# Altium PCB 2_Smoke_detector.PcbDoc (part 5 of 5)
Units mil, origin at the board's own origin, x right, y up, seen from the top; angles counter-clockwise.
Board outline 3800 x 3790 mil, 4 copper layers (Top Layer, Layer 1, Layer 2, Bottom Layer), stack 23.756 mil thick; 122 components, 70 nets, 333 pads, 0 vias.
Unrouted connection lines stored in the file: 251.
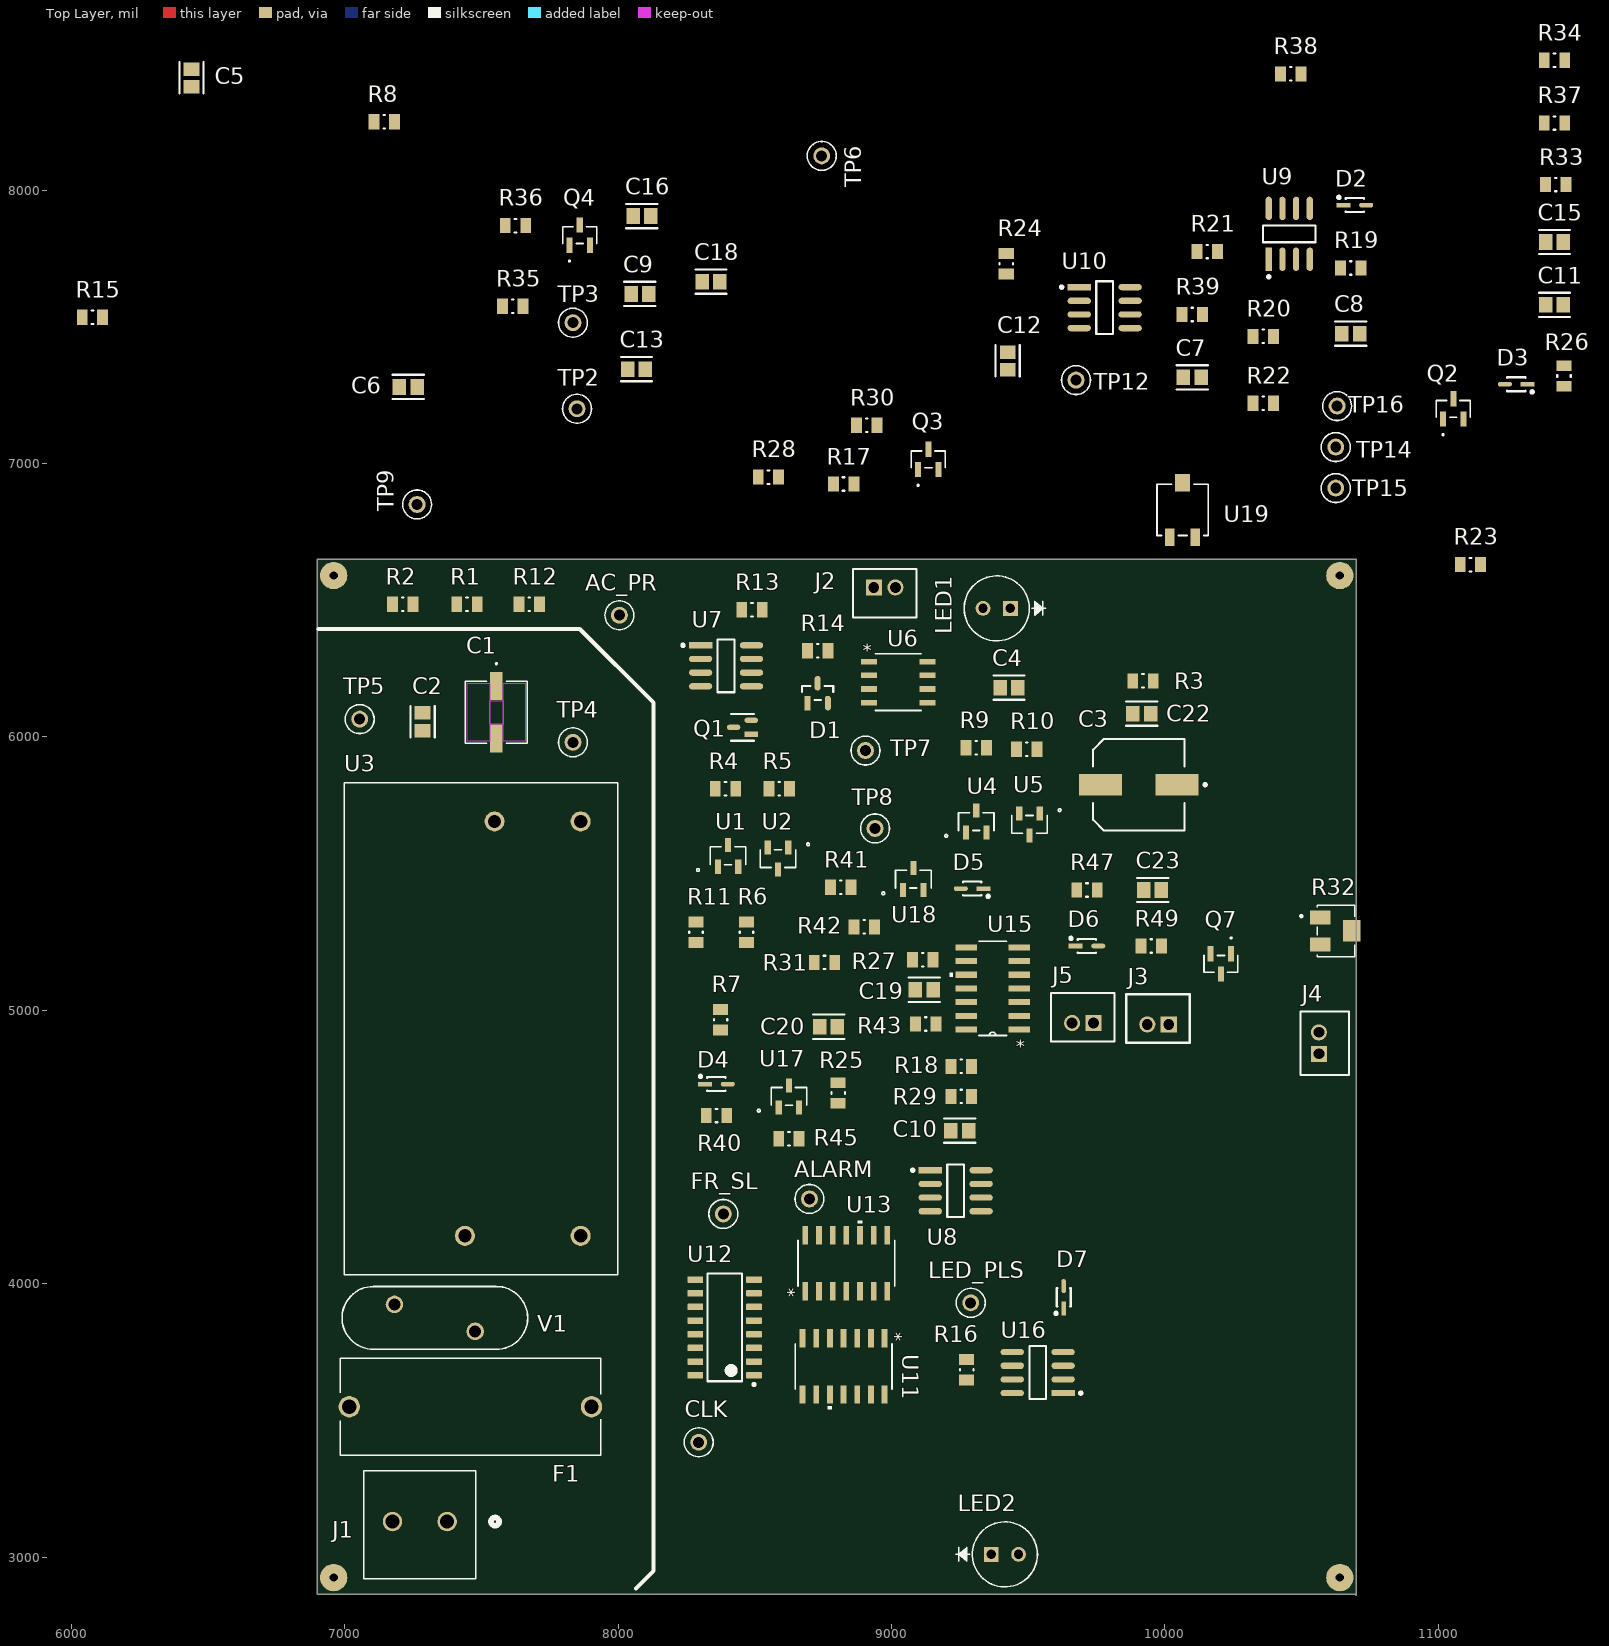
[diagram p0: Top Layer view]

## Part data (continued)
U3: library part IRM-05-5, "AC/DC CONVERTER 5V 5W", Current - Output 1=1A, LCSC Part Number=C48603696, Manufacturer="Mean Well", Max Operating Temperature=70°C, Max Output Power=5W, Max Output Voltage=5.125V, Max Supply Voltage=305V, Min Input Voltage=85V, Min Operating Temperature=-30°C, Min Output Voltage=4.875V, Nominal Output Voltage=5V, Nominal Supply Voltage=115V, Approvals="CB, CE, IEC, TUV, UL", Category="Power Supply Modules", ComponentLink1Description=https://datasheet.octopart.com:443/IRM-05-5-Mean-Well-datasheet-180626755.pdf?src-supplier=IHS, ComponentLink1URL=https://datasheet.octopart.com:443/IRM-05-5-Mean-Well-datasheet-180626755.pdf?src-supplier=IHS, ComponentLink2Description=https://datasheet.octopart.com:443/IRM-05-5-Mean-Well-datasheet-101610177.pdf?src-supplier=Farnell, ComponentLink2URL=https://datasheet.octopart.com:443/IRM-05-5-Mean-Well-datasheet-101610177.pdf?src-supplier=Farnell, ComponentLink3Description=https://datasheet.octopart.com:443/IRM-05-5-Mean-Well-datasheet-67333141.pdf?src-supplier=Sager+Power+Systems, ComponentLink3URL=https://datasheet.octopart.com:443/IRM-05-5-Mean-Well-datasheet-67333141.pdf?src-supplier=Sager+Power+Systems, ComponentLink4Description=https://datasheet.octopart.com:443/IRM-05-5-Mean-Well-datasheet-154740696.pdf?src-supplier=Master+Electronics, ComponentLink4URL=https://datasheet.octopart.com:443/IRM-05-5-Mean-Well-datasheet-154740696.pdf?src-supplier=Master+Electronics, ComponentLink5Description=https://datasheet.octopart.com:443/IRM-05-5-Mean-Well-datasheet-34148673.pdf?src-supplier=Future+Electronics, ComponentLink5URL=https://datasheet.octopart.com:443/IRM-05-5-Mean-Well-datasheet-34148673.pdf?src-supplier=Future+Electronics, ComponentLink6Description=https://datasheet.octopart.com:443/IRM-05-5-Mean-Well-datasheet-27625340.pdf?src-supplier=Jameco+(USA), ComponentLink6URL=https://datasheet.octopart.com:443/IRM-05-5-Mean-Well-datasheet-27625340.pdf?src-supplier=Jameco+(USA), ComponentLink7Description=https://datasheet.octopart.com:443/IRM-05-5-Mean-Well-datasheet-19208722.pdf?src-supplier=Telerex+Europe, ComponentLink7URL=https://datasheet.octopart.com:443/IRM-05-5-Mean-Well-datasheet-19208722.pdf?src-supplier=Telerex+Europe, ComponentLink8Description=https://datasheet.octopart.com:443/IRM-05-5-Mean-Well-datasheet-194193599.pdf?src-supplier=LCSC, ComponentLink8URL=https://datasheet.octopart.com:443/IRM-05-5-Mean-Well-datasheet-194193599.pdf?src-supplier=LCSC, ComponentLink9Description=https://datasheet.octopart.com:443/IRM-05-5-Mean-Well-datasheet-158921293.pdf?src-supplier=Component+Distributors+Inc., ComponentLink9URL=https://datasheet.octopart.com:443/IRM-05-5-Mean-Well-datasheet-158921293.pdf?src-supplier=Component+Distributors+Inc., ComponentLink10Description=https://datasheet.octopart.com:443/IRM-05-5-Mean-Well-datasheet-137204475.pdf?src-supplier=Component+Distributors+Inc., ComponentLink10URL=https://datasheet.octopart.com:443/IRM-05-5-Mean-Well-datasheet-137204475.pdf?src-supplier=Component+Distributors+Inc., ComponentLink11Description=https://datasheet.octopart.com:443/IRM-05-5-Mean-Well-datasheet-151511263.pdf?src-supplier=TME, ComponentLink11URL=https://datasheet.octopart.com:443/IRM-05-5-Mean-Well-datasheet-151511263.pdf?src-supplier=TME, ComponentLink12Description=https://datasheet.octopart.com:443/IRM-05-5-Mean-Well-datasheet-151511270.pdf?src-supplier=TME, ComponentLink12URL=https://datasheet.octopart.com:443/IRM-05-5-Mean-Well-datasheet-151511270.pdf?src-supplier=TME, ComponentLink13Description=https://datasheet.octopart.com:443/IRM-05-5-Mean-Well-datasheet-83579035.pdf?src-supplier=TME, ComponentLink13URL=https://datasheet.octopart.com:443/IRM-05-5-Mean-Well-datasheet-83579035.pdf?src-supplier=TME, ComponentLink14Description=https://datasheet.octopart.com:443/IRM-05-5-Mean-Well-datasheet-24998212.pdf?src-supplier=TME, ComponentLink14URL=https://datasheet.octopart.com:443/IRM-05-5-Mean-Well-datasheet-24998212.pdf?src-supplier=TME, ComponentLink15Description=https://datasheet.octopart.com:443/IRM-05-5-Mean-Well-datasheet-140567947.pdf?src-supplier=Arrow.cn, ComponentLink15URL=https://datasheet.octopart.com:443/IRM-05-5-Mean-Well-datasheet-140567947.pdf?src-supplier=Arrow.cn, Composition=Hybrid, Efficiency=71%, Export Control Classification Number (ECCN) Code=EAR99, Height=21.5mm, Height - Seated (Max)=21.5mm, Introduction Date=2013-07-05, Lead Free="Lead Free", Length=45.7mm, Lifecycle Status=Production, Manufacturer Part Number=IRM-05-5, Max Output current=1A, Max Power Dissipation=5W, Min Supply Voltage=85V, Mounting Technology="PCB, Through Hole", Number of Circuits=1, Number of Outputs=1, Number of Terminals=4, Output Current=1A, Output Power=5W, Output Voltage=5V, Pins=4, Pricing="1=7.467, 20=7.35, 50=7.162 (USD)", REACH SVHC=Unaffected, RoHS=Compliant, Stock=18160, Supplier="Arrow Electronics", Supplier Part Number=IRM-05-5, Voltage - Output 1=5V, Weight=39.999986g, Width=25.4mm
U6: library part LT1763IS8-5#PBF, "IC REG LINEAR 5V 500MA 8-SO", Dropout Voltage=300mV, LCSC Part Number=C190921, Manufacturer="Analog Devices", Manufacturer Lifecycle Status=PRODUCTION, Max Operating Temperature=125°C, Max Supply Voltage=20V, Min Current Limit=520mA, Min Input Voltage=1.8V, Min Operating Temperature=-40°C, Nominal Output Voltage=5V, Operating Supply Current=30µA, Output Current=500mA, Power Supply Rejection Ratio (PSRR)=65dB, Category="LDO Voltage Regulators", ComponentLink1Description=https://octopart.com:443/opatz8j6/c1?t=Ebpcw7CmPQtKNRnGwzCsB8Km5QI9SJKjuQjJH0aKtBETBPytFrpjDY6oFgIq1hiQXU_Ry5HVNKnDBr9_yr5U1VD3FTwTD8YC5rP2o44Ab-hGVQM7czKy67lcZ3cEKdPmXMg_Z_cGbSh3vKzdLA1h_IU9v3WoVfL7cJSuIKmWmZ6Fprabk8AzFbd_zlTnU_mZmTTWMhcBBAtpUXbuQYrFbJG3wspjmbLLERIatjPVcqSkkM_MuCcFPHZJZUl04vK-K-3Q5sidJHL7KRZw34vc0DdA8yiHVpnaAIuodgrAzMkxjVJPvC5okA&src-supplier=Analog+Devices, ComponentLink1URL=https://octopart.com:443/opatz8j6/c1?t=Ebpcw7CmPQtKNRnGwzCsB8Km5QI9SJKjuQjJH0aKtBETBPytFrpjDY6oFgIq1hiQXU_Ry5HVNKnDBr9_yr5U1VD3FTwTD8YC5rP2o44Ab-hGVQM7czKy67lcZ3cEKdPmXMg_Z_cGbSh3vKzdLA1h_IU9v3WoVfL7cJSuIKmWmZ6Fprabk8AzFbd_zlTnU_mZmTTWMhcBBAtpUXbuQYrFbJG3wspjmbLLERIatjPVcqSkkM_MuCcFPHZJZUl04vK-K-3Q5sidJHL7KRZw34vc0DdA8yiHVpnaAIuodgrAzMkxjVJPvC5okA&src-supplier=Analog+Devices, ComponentLink2Description=https://datasheet.octopart.com:443/LT1763IS8-5%23PBF-Linear-Technology-datasheet-10687378.pdf?src-supplier=Upverter, ComponentLink2URL=https://datasheet.octopart.com:443/LT1763IS8-5%23PBF-Linear-Technology-datasheet-10687378.pdf?src-supplier=Upverter, ComponentLink3Description=https://datasheet.octopart.com:443/LT1763IS8-5%23PBF-Analog-Devices-datasheet-34225385.pdf?src-supplier=element14+APAC, ComponentLink3URL=https://datasheet.octopart.com:443/LT1763IS8-5%23PBF-Analog-Devices-datasheet-34225385.pdf?src-supplier=element14+APAC, ComponentLink4Description=https://datasheet.octopart.com:443/LT1763IS8-5%23PBF-Linear-Technology-datasheet-8700792.pdf?src-supplier=Farnell, ComponentLink4URL=https://datasheet.octopart.com:443/LT1763IS8-5%23PBF-Linear-Technology-datasheet-8700792.pdf?src-supplier=Farnell, ComponentLink5Description=https://sigma.octopart.com:443/57689574/technical_drawing/Linear-Technology-LT1763IS8-5%23PBF.pdf?src-supplier=Linear+Technology, ComponentLink5URL=https://sigma.octopart.com:443/57689574/technical_drawing/Linear-Technology-LT1763IS8-5%23PBF.pdf?src-supplier=Linear+Technology, ComponentLink6Description=https://datasheet.octopart.com:443/LT1763IS8-5%23PBF-Linear-Technology-datasheet-503827.pdf?src-supplier=Component+Distributors+Inc., ComponentLink6URL=https://datasheet.octopart.com:443/LT1763IS8-5%23PBF-Linear-Technology-datasheet-503827.pdf?src-supplier=Component+Distributors+Inc., ComponentLink7Description=http://sigma.octopart.com:80/conflict_mineral_statement/Analog-Devices-company-33.pdf?src-supplier=Compliance+Statements, ComponentLink7URL=http://sigma.octopart.com:80/conflict_mineral_statement/Analog-Devices-company-33.pdf?src-supplier=Compliance+Statements, ComponentLink8Description=https://octopart.com:443/opatz8j6/c1?t=kVQKxYRg13CYfxrdy69KyFd_rl0hY_LDqWrQ1YyOKtTyuOMylFgcnP0bVUf3GNrw39o-SRsGyQXIdnmWtO9oyzBU0EuAiBa8NCdTUj49_csqsGjvb8cZ9nRchLctyLtWi99s3K5VC9WM2qNU-bZvQtidgMGLK4xXjXMUZ0FmF3SNi_KWH-PQucqQoFGvz1WqkLsK056S5i-IR1Z8uIKtKSojWwisOZKXV74ikTz1ClZZY-pb3NQiLtvP1d0Ba0e-hiuaWQXP8NV9QpynSvhLpLEizviPxLHwFDE0Ky8Efs26IPoaZupI1Q&src-supplier=Compliance+Statements, ComponentLink8URL=https://octopart.com:443/opatz8j6/c1?t=kVQKxYRg13CYfxrdy69KyFd_rl0hY_LDqWrQ1YyOKtTyuOMylFgcnP0bVUf3GNrw39o-SRsGyQXIdnmWtO9oyzBU0EuAiBa8NCdTUj49_csqsGjvb8cZ9nRchLctyLtWi99s3K5VC9WM2qNU-bZvQtidgMGLK4xXjXMUZ0FmF3SNi_KWH-PQucqQoFGvz1WqkLsK056S5i-IR1Z8uIKtKSojWwisOZKXV74ikTz1ClZZY-pb3NQiLtvP1d0Ba0e-hiuaWQXP8NV9QpynSvhLpLEizviPxLHwFDE0Ky8Efs26IPoaZupI1Q&src-supplier=Compliance+Statements, Lifecycle Status=Production, Manufacturer Part Number=LT1763IS8-5#PBF, Number of Outputs=1, Number of Regulators=1, Output Type=Fixed, Output Voltage=5V, Pins=8, Polarity=Positive, Pricing="1=7.815, 10=5.751, 25=5.694, 100=5.072 (USD)", REACH SVHC=Unaffected, RoHS=Compliant, Schedule B="8542390000, 8542390000|8542390000|8542390000|8542390000|8542390000|8542390000|8542390000|8542390000|8542390000|8542390000|8542390000|8542390000|8542390000|8542390000|8542390000|8542390000|8542390000|8542390000|8542390000|8542390000|8542390000|8542390000|8542390000|85", Stock=119, Supplier="Arrow Electronics", Supplier Part Number=LT1763IS8-5#PBF
U7 U8 U9 U10 U16: library part TLV9062IDR, "IC OP AMP 2CH 8-SOIC", Case/Package=SOIC, Input Bias Current=0.5pA, Input Offset Voltage (Vos)=300uV, LCSC Part Number=C398355, Max Operating Temperature=125°C, Min Operating Temperature=-40°C, Operating Supply Current=538uA, Output Current per Channel=50mA, Gain Bandwidth Product=10MHz, Mount="Surface Mount", Number of Channels=2, Number of Circuits=2, Number of Pins=8, Packaging="Tape and Reel", RoHS Compliant=Yes, Slew Rate=6.5V/µs
U11: library part 74HC86D,653, "IC XOR 4-CIR 2-IN 14-SOIC", Case/Package=SOP, High Level Output Current=-5.2mA, LCSC Part Number=C5955, Load Capacitance=50pF, Low Level Output Current=4mA, Manufacturer=Nexperia, Manufacturer Lifecycle Status="RELEASED FOR SUPPLY", Max Operating Temperature=125°C, Max Supply Voltage=6V, Min Operating Temperature=-40°C, Min Supply Voltage=2V, Nominal Supply Voltage (DC)=5V, Output Current=5.2mA, Quiescent Current=2µA, Temperature Grade=Automotive, Category="Logic Gates", China RoHS=Compliant, ComponentLink1Description=https://datasheet.octopart.com:443/74HC86D%2C653-Nexperia-datasheet-87580431.pdf?src-supplier=Augswan, ComponentLink1URL=https://datasheet.octopart.com:443/74HC86D%2C653-Nexperia-datasheet-87580431.pdf?src-supplier=Augswan, ComponentLink2Description=https://datasheet.octopart.com:443/74HC86D%2C653-Nexperia-datasheet-61648451.pdf?src-supplier=IHS, ComponentLink2URL=https://datasheet.octopart.com:443/74HC86D%2C653-Nexperia-datasheet-61648451.pdf?src-supplier=IHS, ComponentLink3Description=https://datasheet.octopart.com:443/74HC86D%2C653-Nexperia-datasheet-140812836.pdf?src-supplier=IHS, ComponentLink3URL=https://datasheet.octopart.com:443/74HC86D%2C653-Nexperia-datasheet-140812836.pdf?src-supplier=IHS, ComponentLink4Description=https://datasheet.octopart.com:443/74HC86D%2C653-Philips-datasheet-12513527.pdf?src-supplier=element14+APAC, ComponentLink4URL=https://datasheet.octopart.com:443/74HC86D%2C653-Philips-datasheet-12513527.pdf?src-supplier=element14+APAC, ComponentLink5Description=https://datasheet.octopart.com:443/74HC86D%2C653-NXP-datasheet-19589.pdf?src-supplier=Arrow+Electronics, ComponentLink5URL=https://datasheet.octopart.com:443/74HC86D%2C653-NXP-datasheet-19589.pdf?src-supplier=Arrow+Electronics, ComponentLink6Description=https://datasheet.octopart.com:443/74HC86D%2C653-Nexperia-datasheet-160667643.pdf?src-supplier=SHENGYU+ELECTRONICS, ComponentLink6URL=https://datasheet.octopart.com:443/74HC86D%2C653-Nexperia-datasheet-160667643.pdf?src-supplier=SHENGYU+ELECTRONICS, ComponentLink7Description=https://datasheet.octopart.com:443/74HC86D%2C653-NXP-Semiconductors-datasheet-17720673.pdf?src-supplier=Jameco+(USA), ComponentLink7URL=https://datasheet.octopart.com:443/74HC86D%2C653-NXP-Semiconductors-datasheet-17720673.pdf?src-supplier=Jameco+(USA), ComponentLink8Description=http://sigma.octopart.com:80/reach_statement/NXP-Semiconductors-company-13.pdf?src-supplier=Compliance+Statements, ComponentLink8URL=http://sigma.octopart.com:80/reach_statement/NXP-Semiconductors-company-13.pdf?src-supplier=Compliance+Statements, ComponentLink9Description=http://sigma.octopart.com:80/rohs_statement/NXP-Semiconductors-company-12.pdf?src-supplier=Compliance+Statements, ComponentLink9URL=http://sigma.octopart.com:80/rohs_statement/NXP-Semiconductors-company-12.pdf?src-supplier=Compliance+Statements, Contact Plating=Gold, Country of Origin="Mainland China, Thailand", Export Control Classification Number (ECCN) Code=EAR99, Harmonized Tariff Schedule (HTS) Code=8542.39.00.01, Height - Seated (Max)=1.75mm, Introduction Date=1990-12-01, Lead Free="Lead Free", Length=8.65mm, Lifecycle Status=Production, Logic Function="OR, XOR", Manufacturer Part Number=74HC86D,653, Mounting Technology="Surface Mount", Number of Circuits=4, Number of Elements=4, Number of Gates=4, Number of Input Lines=8, Number of Inputs=2, Number of Output Lines=4, Number of Outputs=1, Number of Terminals=14, Operating Supply Voltage=5V, Pins=14, Pricing="2500=0.116, 5000=0.115, 10000=0.113, 37500=0.11 (USD)", Propagation Delay=36ns, Radiation Hardening=No, REACH SVHC=Unaffected, RoHS=Compliant, Schedule B="8542390000, 8542390000|8542390000|8542390000|8542390000|8542390000", Schmitt Trigger Input=No, Stock=27500, Supplier="Future Electronics", Supplier Part Number=74HC86D,653, Terminal Pitch=1.27mm, Turn-On Delay Time=36ns, Width=3.9mm
U12: library part SN74HC191DR, "IC BINARY COUNTER 4-BIT 16SOIC", Case/Package=SOIC, Frequency=48MHz, LCSC Part Number=C484752, Manufacturer="Texas Instruments", Manufacturer Lifecycle Status=ACTIVE, Max Operating Temperature=85°C, Max Supply Voltage=6V, Min Operating Temperature=-40°C, Min Supply Voltage=2V, Operating Supply Voltage=5V, Category=Counters, Clock Edge Trigger Type="Positive Edge", ComponentLink1Description=https://datasheet.octopart.com:443/SN74HC191DR-Texas-Instruments-datasheet-33033771.pdf?src-supplier=Texas+Instruments, ComponentLink1URL=https://datasheet.octopart.com:443/SN74HC191DR-Texas-Instruments-datasheet-33033771.pdf?src-supplier=Texas+Instruments, ComponentLink2Description=https://octopart.com:443/opatz8j6/c1?t=livQ8q43hWssvsTbIukJTl-bIiZFqHZ0_eG3ZISHFBGsaXj-6bBEoDG3PlwY2extO-X4vpm_CU7QLECDmgYzLGckRBw-Kbj8krgv4rmDK5yCwmDJ3CNVrP-qwPYpI0C_npVjETDCSzGdwJl8AedVD4--R_M23QxTnmHvlW1ezJkcgh_L1X-WuZU7RjpO56SQ3Zy_2CfdvVUvgApZvWencagwVo7xUZlWYvKblZWRwPqoRaIW_0nKcn1YlJgtddRiOWr6k4nRbeS5A28F22AkvDGS5XTih2WxDgVJofo11MXYRBHOIIfl1zg_UGo2ZSsVug4JVBZftDOiZiHXpjFkYXXcMh70ddjpxIu2AbTHTmViyoSqUNmmygbjeYWlvFqXFwPzDA&src-supplier=Texas+Instruments, ComponentLink2URL=https://octopart.com:443/opatz8j6/c1?t=livQ8q43hWssvsTbIukJTl-bIiZFqHZ0_eG3ZISHFBGsaXj-6bBEoDG3PlwY2extO-X4vpm_CU7QLECDmgYzLGckRBw-Kbj8krgv4rmDK5yCwmDJ3CNVrP-qwPYpI0C_npVjETDCSzGdwJl8AedVD4--R_M23QxTnmHvlW1ezJkcgh_L1X-WuZU7RjpO56SQ3Zy_2CfdvVUvgApZvWencagwVo7xUZlWYvKblZWRwPqoRaIW_0nKcn1YlJgtddRiOWr6k4nRbeS5A28F22AkvDGS5XTih2WxDgVJofo11MXYRBHOIIfl1zg_UGo2ZSsVug4JVBZftDOiZiHXpjFkYXXcMh70ddjpxIu2AbTHTmViyoSqUNmmygbjeYWlvFqXFwPzDA&src-supplier=Texas+Instruments, ComponentLink3Description=https://datasheet.octopart.com:443/SN74HC191DR-Texas-Instruments-datasheet-10254193.pdf?src-supplier=Texas+Instruments, ComponentLink3URL=https://datasheet.octopart.com:443/SN74HC191DR-Texas-Instruments-datasheet-10254193.pdf?src-supplier=Texas+Instruments, ComponentLink4Description=https://sigma.octopart.com:443/49249801/technical_drawing/Texas-Instruments-SN74HC191DR.pdf?src-supplier=Texas+Instruments, ComponentLink4URL=https://sigma.octopart.com:443/49249801/technical_drawing/Texas-Instruments-SN74HC191DR.pdf?src-supplier=Texas+Instruments, ComponentLink5Description=https://datasheet.octopart.com:443/SN74HC191DR-Texas-Instruments-datasheet-10253684.pdf?src-supplier=Texas+Instruments, ComponentLink5URL=https://datasheet.octopart.com:443/SN74HC191DR-Texas-Instruments-datasheet-10253684.pdf?src-supplier=Texas+Instruments, ComponentLink6Description=https://datasheet.octopart.com:443/SN74HC191DR-Texas-Instruments-datasheet-149727.pdf?src-supplier=Mouser, ComponentLink6URL=https://datasheet.octopart.com:443/SN74HC191DR-Texas-Instruments-datasheet-149727.pdf?src-supplier=Mouser, ComponentLink7Description=https://datasheet.octopart.com:443/SN74HC191DR-Texas-Instruments-datasheet-11538999.pdf?src-supplier=HQonline, ComponentLink7URL=https://datasheet.octopart.com:443/SN74HC191DR-Texas-Instruments-datasheet-11538999.pdf?src-supplier=HQonline, ComponentLink8Description=https://datasheet.octopart.com:443/SN74HC191DR-Texas-Instruments-datasheet-165804434.pdf?src-supplier=LCSC, ComponentLink8URL=https://datasheet.octopart.com:443/SN74HC191DR-Texas-Instruments-datasheet-165804434.pdf?src-supplier=LCSC, ComponentLink9Description=https://datasheet.octopart.com:443/SN74HC191DR-Texas-Instruments-datasheet-159116066.pdf?src-supplier=LCSC, ComponentLink9URL=https://datasheet.octopart.com:443/SN74HC191DR-Texas-Instruments-datasheet-159116066.pdf?src-supplier=LCSC, ComponentLink10Description=https://datasheet.octopart.com:443/SN74HC191DR-Texas-Instruments-datasheet-164417292.pdf?src-supplier=SHENGYU+ELECTRONICS, ComponentLink10URL=https://datasheet.octopart.com:443/SN74HC191DR-Texas-Instruments-datasheet-164417292.pdf?src-supplier=SHENGYU+ELECTRONICS, ComponentLink11Description=https://datasheet.octopart.com:443/SN74HC191DR-Texas-Instruments-datasheet-125515.pdf?src-supplier=DigiKey, ComponentLink11URL=https://datasheet.octopart.com:443/SN74HC191DR-Texas-Instruments-datasheet-125515.pdf?src-supplier=DigiKey, ComponentLink12Description=http://sigma.octopart.com:80/reach_statement/Texas-Instruments-company-64.pdf?src-supplier=Compliance+Statements, ComponentLink12URL=http://sigma.octopart.com:80/reach_statement/Texas-Instruments-company-64.pdf?src-supplier=Compliance+Statements, ComponentLink13Description=http://sigma.octopart.com:80/conflict_mineral_statement/Texas-Instruments-company-63.pdf?src-supplier=Compliance+Statements, ComponentLink13URL=http://sigma.octopart.com:80/conflict_mineral_statement/Texas-Instruments-company-63.pdf?src-supplier=Compliance+Statements, Direction=Bidirectional, Height=1.75mm, Lead Free="Lead Free", Length=9.9mm, Lifecycle Status=Production, Logic Function=Counter, Manufacturer Part Number=SN74HC191DR, Mounting Technology="Surface Mount", Number of Bits=4, Number of Bits per Element=4, Number of Elements=1, Parameter 1=C484752, Pins=16, Pricing="1=0.3109, 10=0.3077, 25=0.3045, 100=0.3012, 250=0.298, 500=0.2948 (USD)", Propagation Delay=330ns, Radiation Hardening=No, RoHS=Compliant, Schedule B="8542390000, 8542390000|8542390000|8542390000|8542390000|8542390000", Stock=558, Supplier="Arrow Electronics", Supplier Part Number=C484752, Sync/Async=Synchronous, Thickness=1.58mm, Turn-On Delay Time=330ns, Weight=141.690917mg, Width=3.91mm
U13: library part 74HC02D,653, "IC NOR 4-CIR 2-IN 14-SOIC", Case/Package=SOP, High Level Output Current=-5.2mA, LCSC Part Number=C5588, Load Capacitance=50pF, Low Level Output Current=4mA, Manufacturer=Nexperia, Manufacturer Lifecycle Status="RELEASED FOR SUPPLY", Max Operating Temperature=125°C, Max Supply Current=40µA, Max Supply Voltage=6V, Min Operating Temperature=-40°C, Min Supply Voltage=2V, Nominal Supply Voltage (DC)=5V, Output Current=5.2mA, Quiescent Current=2µA, Temperature Grade=Automotive, Category="Logic Gates", China RoHS=Compliant, ComponentLink1Description=https://datasheet.octopart.com:443/74HC02D%2C653-Nexperia-datasheet-87580166.pdf?src-supplier=IHS, ComponentLink1URL=https://datasheet.octopart.com:443/74HC02D%2C653-Nexperia-datasheet-87580166.pdf?src-supplier=IHS, ComponentLink2Description=https://datasheet.octopart.com:443/74HC02D%2C653-Nexperia-datasheet-59327597.pdf?src-supplier=Newark, ComponentLink2URL=https://datasheet.octopart.com:443/74HC02D%2C653-Nexperia-datasheet-59327597.pdf?src-supplier=Newark, ComponentLink3Description=https://datasheet.octopart.com:443/74HC02D%2C653-Nexperia-datasheet-11978307.pdf?src-supplier=element14+APAC, ComponentLink3URL=https://datasheet.octopart.com:443/74HC02D%2C653-Nexperia-datasheet-11978307.pdf?src-supplier=element14+APAC, ComponentLink4Description=https://datasheet.octopart.com:443/74HC02D%2C653-Nexperia-datasheet-5318266.pdf?src-supplier=Factory+Futures, ComponentLink4URL=https://datasheet.octopart.com:443/74HC02D%2C653-Nexperia-datasheet-5318266.pdf?src-supplier=Factory+Futures, ComponentLink5Description=https://datasheet.octopart.com:443/74HC02D%2C653-Nexperia-datasheet-160667651.pdf?src-supplier=Augswan, ComponentLink5URL=https://datasheet.octopart.com:443/74HC02D%2C653-Nexperia-datasheet-160667651.pdf?src-supplier=Augswan, ComponentLink6Description=https://datasheet.octopart.com:443/74HC02D%2C653-Nexperia-datasheet-180922420.pdf?src-supplier=TME, ComponentLink6URL=https://datasheet.octopart.com:443/74HC02D%2C653-Nexperia-datasheet-180922420.pdf?src-supplier=TME, ComponentLink7Description=http://sigma.octopart.com:80/reach_statement/NXP-Semiconductors-company-13.pdf?src-supplier=Compliance+Statements, ComponentLink7URL=http://sigma.octopart.com:80/reach_statement/NXP-Semiconductors-company-13.pdf?src-supplier=Compliance+Statements, ComponentLink8Description=http://sigma.octopart.com:80/rohs_statement/NXP-Semiconductors-company-12.pdf?src-supplier=Compliance+Statements, ComponentLink8URL=http://sigma.octopart.com:80/rohs_statement/NXP-Semiconductors-company-12.pdf?src-supplier=Compliance+Statements, Contact Plating=Gold, Country of Origin="Mainland China, Thailand", Export Control Classification Number (ECCN) Code=EAR99, Harmonized Tariff Schedule (HTS) Code=8542.39.00.01, Height - Seated (Max)=1.75mm, Introduction Date=1990-12-01, Lead Free="Lead Free", Length=8.65mm, Lifecycle Status=Production, Logic Function=NOR, Manufacturer Part Number=74HC02D,653, Mounting Technology="Surface Mount", Number of Channels=4, Number of Circuits=4, Number of Elements=4, Number of Gates=4, Number of Input Lines=2, Number of Inputs=2, Number of Output Lines=1, Number of Terminals=14, Operating Supply Voltage=5V, Pins=14, Pricing="2500=0.109, 5000=0.107, 10000=0.106, 37500=0.103 (USD)", Propagation Delay=27ns, Radiation Hardening=No, REACH SVHC=Unaffected, RoHS=Compliant, Schedule B="8542390000, 8542390000|8542390000|8542390000|8542390000|8542390000", Schmitt Trigger Input=No, Stock=87500, Supplier="Future Electronics", Supplier Part Number=74HC02D,653, Terminal Pitch=1.27mm, Turn-On Delay Time=7ns, Voltage=5V, Width=3.9mm
U15: library part TLC556IDR, "IC OSC TIMER DUAL 2.1MHZ 14-SOIC", Case/Package=SOIC, Frequency=2.1MHz, High Level Output Current=-10mA, LCSC Part Number=C85051, Low Level Output Current=100mA, Manufacturer="Texas Instruments", Manufacturer Lifecycle Status=ACTIVE, Max Operating Temperature=85°C, Max Power Dissipation=950mW, Max Supply Voltage=18V, Min Operating Temperature=-40°C, Min Supply Voltage=3V, Nominal Supply Current=130µA, Operating Supply Current=720µA, Category="Timers and Oscillators", ComponentLink1Description=https://sigma.octopart.com:443/182471030/technical_drawing/Texas-Instruments-TLC556IDR.pdf?src-supplier=Texas+Instruments, ComponentLink1URL=https://sigma.octopart.com:443/182471030/technical_drawing/Texas-Instruments-TLC556IDR.pdf?src-supplier=Texas+Instruments, ComponentLink2Description=https://octopart.com:443/opatz8j6/c1?t=wVb5vgt0zPQWKkF67eX7szHFu9eke679Os8KuuvsewqxubaA68h0RbxCTMV96P98jOA947BI5otjYLTO8NlJcm-sT0EwftDyiu21Zrbb2619OTaKXxEY5gqfTVo9yQc5eHmsnO_NjjO9pry39XW7zVwp5JZvYUuFi7CEvLfZBwXUvv5oJGvho0j5oLGTrHUekUSs9TZpc4u8Hs0dZvilMkIXoCg4ZsBkHlIICA4YDxdwRjADArPrk9usKJbDjqGpujKb6DUgPPp-5b6DXLWwp_NVSyXgaG7FrrCxwcsuC9e6EGdk3LvSbo4Poq0m1Apd1KwtZX406OXT8Kt7TXRfkPYmF30X_4theIHGy8QB6ScxhVB1SWES0wyhplT5iwiCIeo&src-supplier=Texas+Instruments, ComponentLink2URL=https://octopart.com:443/opatz8j6/c1?t=wVb5vgt0zPQWKkF67eX7szHFu9eke679Os8KuuvsewqxubaA68h0RbxCTMV96P98jOA947BI5otjYLTO8NlJcm-sT0EwftDyiu21Zrbb2619OTaKXxEY5gqfTVo9yQc5eHmsnO_NjjO9pry39XW7zVwp5JZvYUuFi7CEvLfZBwXUvv5oJGvho0j5oLGTrHUekUSs9TZpc4u8Hs0dZvilMkIXoCg4ZsBkHlIICA4YDxdwRjADArPrk9usKJbDjqGpujKb6DUgPPp-5b6DXLWwp_NVSyXgaG7FrrCxwcsuC9e6EGdk3LvSbo4Poq0m1Apd1KwtZX406OXT8Kt7TXRfkPYmF30X_4theIHGy8QB6ScxhVB1SWES0wyhplT5iwiCIeo&src-supplier=Texas+Instruments, ComponentLink3Description=https://datasheet.octopart.com:443/TLC556IDR-Texas-Instruments-datasheet-32026760.pdf?src-supplier=Texas+Instruments, ComponentLink3URL=https://datasheet.octopart.com:443/TLC556IDR-Texas-Instruments-datasheet-32026760.pdf?src-supplier=Texas+Instruments, ComponentLink4Description=https://datasheet.octopart.com:443/TLC556IDR-Texas-Instruments-datasheet-10255761.pdf?src-supplier=Texas+Instruments, ComponentLink4URL=https://datasheet.octopart.com:443/TLC556IDR-Texas-Instruments-datasheet-10255761.pdf?src-supplier=Texas+Instruments, ComponentLink5Description=https://sigma.octopart.com:443/49249646/technical_drawing/Texas-Instruments-TLC556IDR.pdf?src-supplier=Texas+Instruments, ComponentLink5URL=https://sigma.octopart.com:443/49249646/technical_drawing/Texas-Instruments-TLC556IDR.pdf?src-supplier=Texas+Instruments, ComponentLink6Description=https://datasheet.octopart.com:443/TLC556IDR-Texas-Instruments-datasheet-149920.pdf?src-supplier=Texas+Instruments, ComponentLink6URL=https://datasheet.octopart.com:443/TLC556IDR-Texas-Instruments-datasheet-149920.pdf?src-supplier=Texas+Instruments, ComponentLink7Description=https://datasheet.octopart.com:443/TLC556IDR-Texas-Instruments-datasheet-14363887.pdf?src-supplier=HQonline, ComponentLink7URL=https://datasheet.octopart.com:443/TLC556IDR-Texas-Instruments-datasheet-14363887.pdf?src-supplier=HQonline, ComponentLink8Description=https://datasheet.octopart.com:443/TLC556IDR-Texas-Instruments-datasheet-164411896.pdf?src-supplier=LCSC, ComponentLink8URL=https://datasheet.octopart.com:443/TLC556IDR-Texas-Instruments-datasheet-164411896.pdf?src-supplier=LCSC, ComponentLink9Description=https://datasheet.octopart.com:443/TLC556IDR-Texas-Instruments-datasheet-159117753.pdf?src-supplier=LCSC, ComponentLink9URL=https://datasheet.octopart.com:443/TLC556IDR-Texas-Instruments-datasheet-159117753.pdf?src-supplier=LCSC, ComponentLink10Description=https://datasheet.octopart.com:443/TLC556IDR-Texas-Instruments-datasheet-66581719.pdf?src-supplier=Newark, ComponentLink10URL=https://datasheet.octopart.com:443/TLC556IDR-Texas-Instruments-datasheet-66581719.pdf?src-supplier=Newark, ComponentLink11Description=https://datasheet.octopart.com:443/TLC556IDR-Texas-Instruments-datasheet-11637363.pdf?src-supplier=Arrow+Electronics, ComponentLink11URL=https://datasheet.octopart.com:443/TLC556IDR-Texas-Instruments-datasheet-11637363.pdf?src-supplier=Arrow+Electronics, ComponentLink12Description=https://datasheet.octopart.com:443/TLC556IDR-Texas-Instruments-datasheet-13614.pdf?src-supplier=DigiKey, ComponentLink12URL=https://datasheet.octopart.com:443/TLC556IDR-Texas-Instruments-datasheet-13614.pdf?src-supplier=DigiKey, ComponentLink13Description=http://sigma.octopart.com:80/reach_statement/Texas-Instruments-company-64.pdf?src-supplier=Compliance+Statements, ComponentLink13URL=http://sigma.octopart.com:80/reach_statement/Texas-Instruments-company-64.pdf?src-supplier=Compliance+Statements, ComponentLink14Description=http://sigma.octopart.com:80/conflict_mineral_statement/Texas-Instruments-company-63.pdf?src-supplier=Compliance+Statements, ComponentLink14URL=http://sigma.octopart.com:80/conflict_mineral_statement/Texas-Instruments-company-63.pdf?src-supplier=Compliance+Statements, Contact Plating=Gold, Height=0m, Lead Free="Lead Free", Length=8.65mm, Lifecycle Status=Production, Manufacturer Part Number=TLC556IDR, Mounting Technology="Surface Mount", Number of Timers/Counters=2, Pins=14, Power Dissipation=950mW, Pricing="1=1.3938, 10=1.0552, 25=0.9641, 100=0.8647, 250=0.8042, 500=0.7847 (USD)", Quiescent Current=130µA, Radiation Hardening=No, RoHS=Compliant, Schedule B="8542390000, 8542390000|8542390000, 8542390000|8542390000|8542390000, 8542390000|8542390000|8542390000|8542390000", Stock=973, Supplier="Arrow Electronics", Supplier Part Number=TLC556IDR, Thickness=1.58mm, Weight=122.413241mg, Width=3.91mm
U19: "TRIMMER 50K OHM 0.25W GW TOP ADJ", LCSC Part Number=C719184, Manufacturer_Name="Bourns Electronics", Copyright="Copyright (C) 2025 Ultra Librarian. All rights reserved.", Manufacturer_Part_Number=3314G-1-503E, RefDes=RefDes, Type=Type
V1: library part V275LA20AP, "VARISTOR 430V 4.5KA DISC 14MM", LCSC Part Number=C70419, Manufacturer_Name="Littelfuse Inc", Copyright="Copyright (C) 2025 Ultra Librarian. All rights reserved.", Manufacturer_Part_Number=V275LA20AP

## Free pads (board coordinates)
  round 100 hole 30: 1(6960,2925) 2(6960,6590) 3(10640,6590) 4(10640,2925)

## Nets (pads, with @x,y where several pads share a name; then routed paths per layer and width w, separated by ;. In a path a pad name is that pad's centre, name@x,y a point inside that pad or via, vN(x,y) a via of type N, cw(c..) or ccw(c..) an arc to the next point about the centre after c; other vN are vias at no path point)
AC_5V: C1.2 C2.1 LED1.2 R1.1 TP4.1 U1.3 U3.VPOS
AC_COMMON: R4.2 R5.2 U1.2 U2.2
AC_L: F1.1 J1.1
AC_L_FUSED: F1.2 U3.AC/L V1.2
AC_N: J1.2 U3.AC/N V1.1
AC_PRESENT: AC_PR.1 Q1.1 R9.1 R12.2 U7.1
AC_SENSE: R1.2 R2.1 R12.1 U7.3
ALARM: ALARM.1 D6.2 U11.2 U12.6 U13.12
BAT+: J2.1 R6.1 U6.5 U6.8
BAT_5V: C5.1 R13.2 TP7.1 U4.3 U6.1 U6.2 U7.8
BAT_SENSE: R6.2 R7.1 R11.1 U7.5
COMMON_AC_GATE: Q1.3 R4.1 U1.1 U2.1
COMMON_SOURCE: C4.1 R10.2 U4.2 U5.2
COMMON_SW_GATE: C4.2 R9.2 R10.1 U4.1 U5.1
COMP_POWER: C8.1 C16.1 Q4.2 R21.2 R32.1 TP9.1 U8.8 U9.8 U10.8
COMPARATOR: R23.2 TP15.1 U9.1 U11.1 U11.13
CTEN: U12.4 U13.3
FREQ_SEL: FR_SL.1 R45.2 U13.11 U17.1
GND: C1.1 C2.2 C3.1 C5.2 C9.2 C10.2 C11.2 C12.2 C15.2 C16.2 C18.2 C19.1 C20.2 C22.1 C23.2 D1.1 D3.2 J2.2 J4.1 J5.2 LED2.1 Q1.2 Q2.2 R2.2 R3.1 R5.1 R7.2 R8.2 R15.1 R16.1 R17.1 R24.1 R26.1 R31.1 R32.3 R36.1 R37.1 R49.1 TP5.1 U3.VNEG U6.3 U6.6 U6.7 U7.4 U8.4 U9.4 U10.4 U11.7 U12.1 U12.8 U12.9 U12.10 U12.15 U13.7 U15.7 U16.4
LED_PULSE: D7.1 LED_PLS.1 R16.2 U13.4 U13.5 U16.5
LED_PULSE_INV: TP2.1 U8.6 U15.5
LOAD_PULSE: U12.11 U16.1
LOW_BAT: R11.2 R41.2 TP8.1 U7.7
NetC6_1: C6.1 Q2.3 U8.2
NetC6_2: C6.2 D2.2 U8.1
NetC7_1: C7.1 J5.1 R39.1 U10.2
NetC7_2: C7.2 R39.2 TP12.1 U9.5 U10.1
NetC8_2: C8.2 D3.1 Q2.1 R26.2
NetC11_1: C11.1 R19.1 TP16.1 U10.5
NetC12_1: C12.1 R21.1 R22.1 R24.2 U10.3
NetC13_1: C13.1 R28.1 U16.7
NetC13_2: C13.2 R30.1 U16.6
NetC15_1: C15.1 R33.1 R34.1 R37.2 U16.2 U16.3
NetC18_1: C18.1 U15.3
NetC19_2: C19.2 U15.11
NetC20_1: C20.1 D4.1 R25.1 R43.1 U15.8 U15.12
NetC23_1: C23.1 Q7.1 R47.2 R49.2
NetD1_3: D1.3 R13.1 R14.2
NetD2_1: D2.1 R19.2
NetD4_2: D4.2 R40.1 R43.2 U15.13 U17.3
NetD5_1: D5.1 D6.1 R47.1
NetD5_2: D5.2 U18.3
NetD7_2: D7.2 U8.7
NetJ3_1: J3.1 Q3.3
NetJ4_2: J4.2 Q7.2
NetLED1_1: LED1.1 R8.1
NetLED2_2: LED2.2 R38.2
NetQ3_1: Q3.1 R28.2
NetQ3_2: Q3.2 R17.2 R30.2
NetQ4_1: Q4.1 R35.1 R36.2
NetR18_1: R18.1 R29.2 U15.1
NetR20_1: R20.1 U10.6 U10.7
NetR20_2: R20.2 R23.1 U9.3
NetR22_2: R22.2 U9.6 U19.1
NetR25_2: R25.2 U17.2
NetR27_1: R27.1 R31.2 U8.5
NetR32_2: R32.2 U9.2
NetR41_1: R41.1 R42.1 U18.1
NetTP13_1: CLK.1 U12.14 U13.6
NetTP14_1: TP14.1 U8.3 U9.7 U19.2
NetU11_3: U11.3 U11.4 U13.2
NetU11_6: U11.6 U12.5
NetU11_8: U11.8 U13.1 U13.13
NetU11_9: U11.9 U13.8
PWR_PULSE: C9.1 R27.2 R35.2 R38.1 R42.2 TP6.1 U15.4 U15.9 U18.2
QA: U12.3 U13.10
QB: U12.2 U13.9
SYS_5V: C3.2 C22.2 J3.2 Q4.3 Q7.3 R3.2 R18.2 R33.2 R34.2 R40.2 R45.1 TP3.1 U2.3 U5.3 U11.5 U11.10 U11.14 U12.16 U13.14 U15.10 U15.14 U16.8
THRES: C10.1 R29.1 U15.2 U15.6
V_REF: R14.1 R15.2 U7.2 U7.6
pads on no net: D1.2 U6.4 U11.11 U11.12 U12.7 U12.12 U12.13 U19.3

## Silkscreen, mask and mechanical layers (free items; w line width, h text height)
Top Overlay:
  lines w15: 6905,6395 7860,6395 8130,6125 8130,2950 8065,2885

## Text inside footprints (layer, text, board x,y; h text height)
U6: Top Overlay "*" at 8895.36,6290.97 h50; Top 3D Body "*" at 8949,6245.5 h50
U11: Top Overlay "*" at 8991,3822.5 h50 r270; Mechanical 13 "*" at 8944,3773.5 h50 r270
U13: Top Overlay "*" at 8669,3950 h50 r90; Mechanical 13 "*" at 8716,3999 h50 r90
U15: Top Overlay "*" at 9489.5,4913 h50 r180; Mechanical 13 "*" at 9489.5,4913 h50 r180